# Altium PCB arduino_Uno_Rev3-02-TH_2022-03-31.pcbdoc (part 2 of 2)
Units mil, origin at the board's own origin, x right, y up, seen from the top; angles counter-clockwise.
Board outline 5460.48 x 4115 mil, 2 copper layers (Top Layer, Bottom Layer); 53 components, 61 nets, 247 pads, 72 vias.
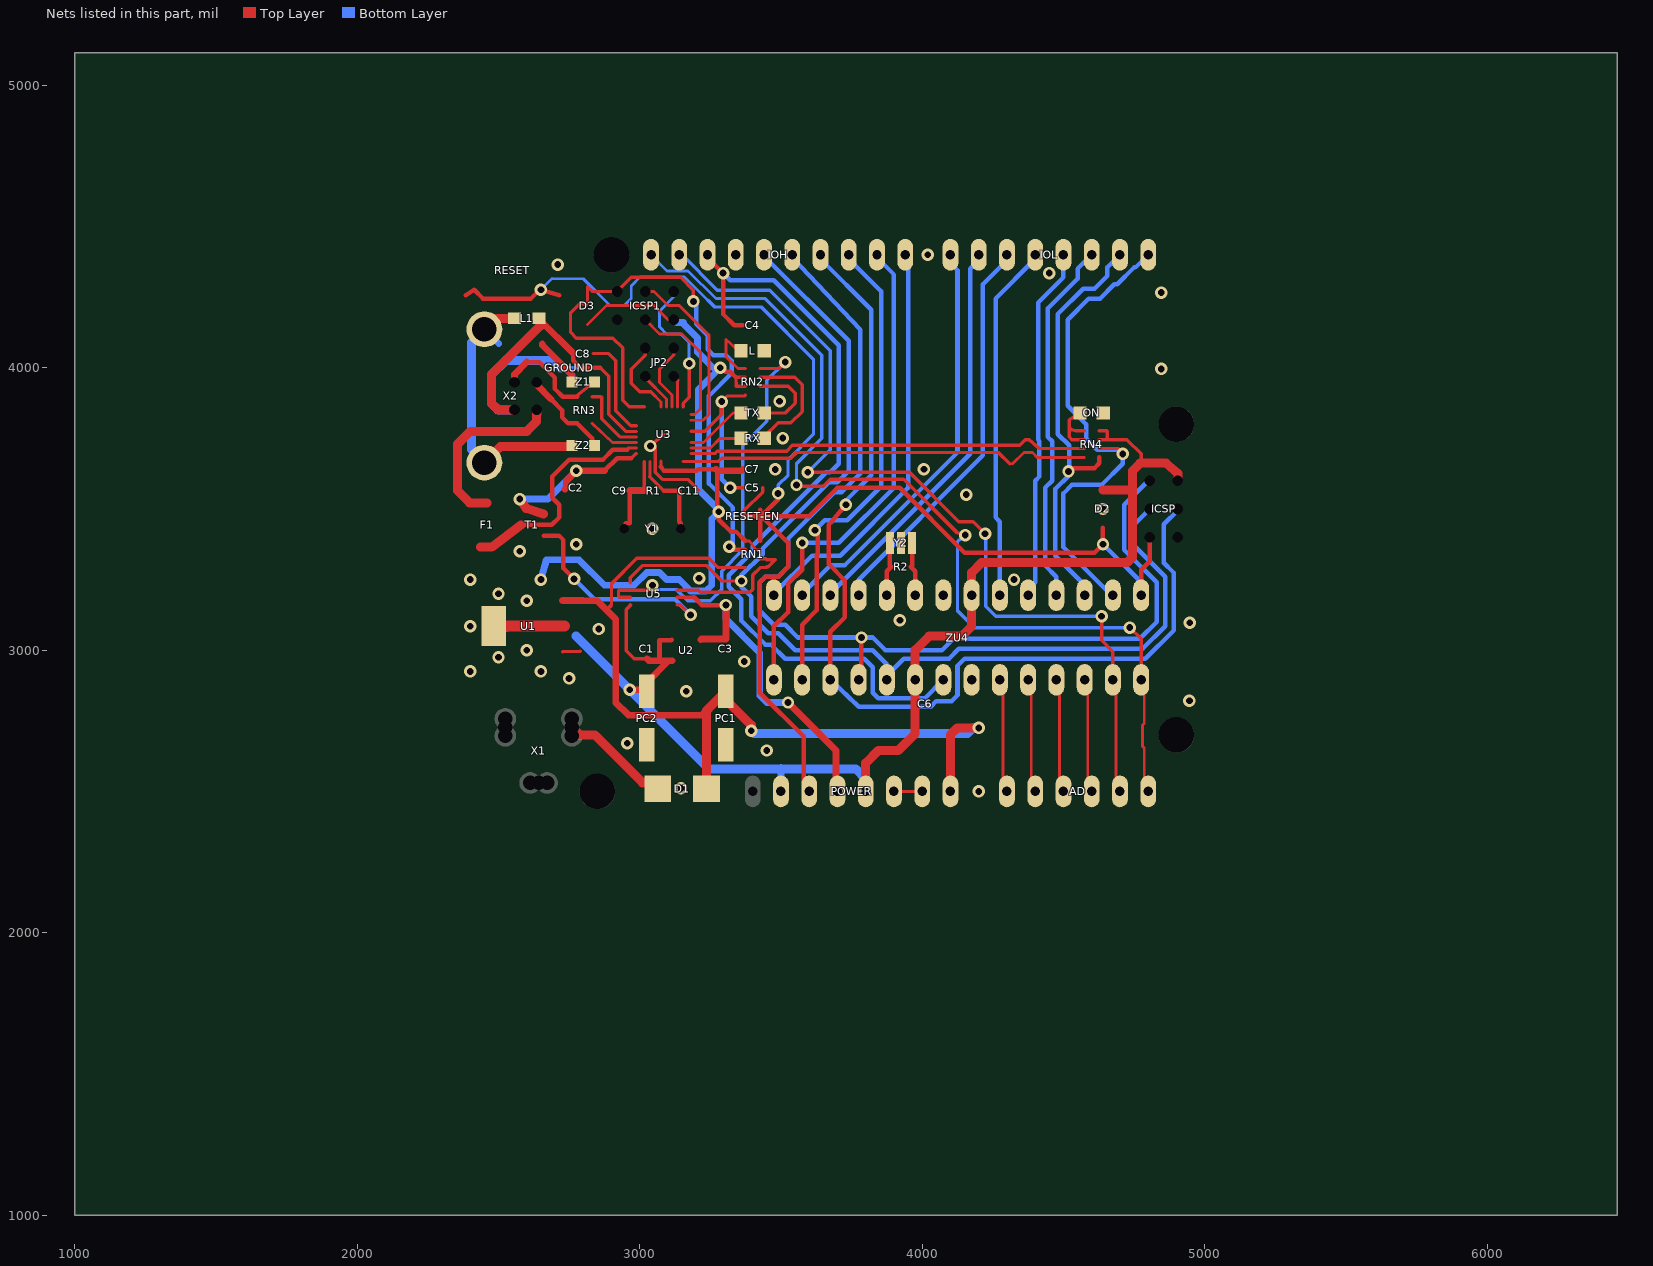
[diagram p2: the nets of this part, all layers, seen from the top]

## Via types
v1: diameter 44, hole 24, Top Layer to Bottom Layer, tented both sides, 72 vias

## Nets (pads, with @x,y where several pads share a name; then routed paths per layer and width w, separated by ;. In a path a pad name is that pad's centre, name@x,y a point inside that pad or via, vN(x,y) a via of type N, cw(c..) or ccw(c..) an arc to the next point about the centre after c; other vN are vias at no path point)
5-GND: RESET.5
+3V3: C3.2 POWER.4 U2.5 U5.2 | length 1260.5
  Top Layer w12: U5.2@3133.19,3187.16 3190.2,3187.2
  Top Layer w16: 3190.2,3187.2 3192.8,3187.2 3220,3160 v1(3305,3160)
  Top Layer w24: U2.5@3216.18,3037.4 3218.8,3040 C3.2@3305,3040 v1(3305,3160) ; v1(3525,2815) 3695,2645 3695,2505 POWER.4@3700,2500
  Bottom Layer w24: v1(3305,3160) 3305,3110 3425,2990 3425,2840 3450,2815 v1(3525,2815)
+5V: C1.2 C2.2 C6.2 C7.1 D2.C D3.C ICSP1.2 ICSP.2 PC2.+ POWER.2 POWER.5 RN1.3 RN1.5 RN2.2 RN2.3 RN4.3 RN4.4 T1.2 U1.2 U1.4 U2.1 U2.3 U3.4 U3.32 U5.8 ZU4.7 ZU4.20 | length 8645.2
  Top Layer w10: D3.C@2815,4153.07 2881.9,4220 3050,4220 3100,4170 ICSP1.2@3120,4170 ; 3375.7,3385 RN1.5@3373.42,3387.24 3388.8,3387.2 3411.3,3355.7 3426.6,3355.7
  Top Layer w12: 2966.9,3161.6 2968.4,3160 2952.5,3144.1 2952.5,2997.5 2980,2970 C1.2@3025,2970 ; 2970,3680 2986.1,3696.1 U3.32@2988.54,3696.1 ; 3075.2,3649.8 U3.4@3075.16,3668.54 ; RN2.3@3373.42,3934.25 3342.2,3934.2 3340.8,3965.7 RN2.2@3373.42,3965.74 ; 4626.6,3745.7 4655,3745.7 ; RN4.4@4626.57,3777.24 4652.8,3777.2 4655,3775 4655,3745.7 ; 4775,3662 4775,3695 4724.3,3745.7 4655,3745.7
  Top Layer w16: 2875,3635 2920,3680 2970,3680 ; 3070,2962.6 3070,3035 3111.4,3035 U2.1@3113.82,3037.4 ; 3075.2,3649.8 3085,3635 3201.1,3635 3206.6,3640.5 3270,3640.5 ; 3275,3635.5 3275,3510 v1(3280,3490) 3280,3461.9 3321.9,3420 3340.7,3420 RN1.5@3373.42,3387.24 ; v1(3285,4000) 3305,3985 3320.8,3985.7 3340.8,3965.7 ; 3967.4,2807.4 3975,2800
  Top Layer w20: U1.2@2727,3085 2734,3086 ; 4900,3600 ICSP.2@4905,3600
  Top Layer w24: 2735,3570 C2.2@2740,3575 2740,3600 v1(2775,3635) 2875,3635 ; v1(2965,2860) 3039.5,2860 PC2.+@3025,2854.49 3025,2885 3102.6,2962.6 U2.3@3113.82,2962.6 3070,2962.6 3032.4,2962.6 C1.2@3025,2970 ; 3270,3640.5 3275,3635.5 3360.5,3635.5 C7.1@3365,3640 ; C6.2@3975,2810 3976.5,2828.5 ZU4.20@3975,2850
  Top Layer w32: v1(2575,3535) 2598,3502 T1.2@2660,3482 ; POWER.5@3800,2500 3800,2600 3845,2645 3915,2645 3975,2705 3975,2800 C6.2@3975,2810 3975,2850 ZU4.20@3975,2895 3975,3000 4025,3050 4140,3050 4175,3085 ZU4.7@4175,3195 4175,3275 4210,3310 4725,3310 4745,3330 4745,3560 ; D2.C@4640,3566.93 4738.1,3566.9 4745,3560 ; 4905,3598.5 ICSP.2@4905,3600 4905,3625 4863,3662 4775,3662 4772,3662 4745,3635 4745,3560
  Top Layer w40: U1.4@2482.99,3085 2530,3085 2531,3086 2734,3086
  Bottom Layer w24: v1(2575,3535) 2675,3535 v1(2775,3635) ; v1(2650,3250) 2670,3320 2785,3320 2875,3230 2980,3230 3025,3275 3070,3275 3095,3250 3140,3250 3180,3210 3235,3210 3255,3230 3255,3465 v1(3280,3490) 3280,3496.6 3208.3,3568.3 3208.3,3923.3 v1(3285,4000) 3260,4000 3205,4055 3205,4105 3155,4155 3155,4160 3130,4160 ICSP1.2@3120,4170 ; POWER.2@3500,2500 3500,2585 3505,2580
  Bottom Layer w32: 2775,3050 v1(2965,2860) 3245,2580 3505,2580 3764,2580 3801,2543 POWER.5@3800,2500
  other v1: 2400,2925 2650,2925 2500,2975 2600,3000 2400,3085 2600,3175 2500,3200 2400,3250 2575,3350
AD0: AD.1 ZU4.23 | length 403.2
  Top Layer w10: ZU4.23@4275,2895 4286,2879 4286,2518 AD.1@4300,2500
AD1: AD.2 ZU4.24 | length 403.2
  Top Layer w10: ZU4.24@4375,2895 4386,2879 4386,2518 AD.2@4400,2500
AD2: AD.3 ZU4.25 | length 403.2
  Top Layer w10: ZU4.25@4475,2895 4486,2879 4486,2518 AD.3@4500,2500
AD3: AD.4 ZU4.26 | length 403.2
  Top Layer w10: ZU4.26@4575,2895 4586,2879 4586,2518 AD.4@4600,2500
AD4/SDA: AD.5 IOH.9 ZU4.27 | length 3192.3
  Top Layer w10: ZU4.27@4675,2895 4686,2879 4686,2518 AD.5@4700,2500
  Top Layer w12: v1(3595,3630) 3955,3630 4130,3455 4180,3455 v1(4222.5,3412.5) v1@4230,3410 ; v1(4635,3120) 4635,3035 4675,2995 ZU4.27@4675,2895
  Bottom Layer w12: IOH.9@3140,4400 3150,4400 3275,4275 3460,4275 3675,4060 3675,3710 v1(3595,3630) ; v1(4222.5,3412.5) 4225,3410 4225,3155 4260,3120 v1(4635,3120)
AD5/SCL: AD.6 IOH.10 ZU4.28 | length 3469.1
  Top Layer w10: ZU4.28@4775,2895 4786,2879 4786,2741 4780,2735 4780,2660 4786,2654 4786,2518 AD.6@4800,2500
  Top Layer w12: v1(3555,3585) 3555,3580 3650,3580 3675,3605 3935,3605 4125,3415 4145,3415 v1(4152.5,3407.5) ; v1(4735,3080) 4775,3040 ZU4.28@4775,2895
  Bottom Layer w10: IOH.10@3040,4400 3096,4343 3171,4343 3270,4245
  Bottom Layer w12: 3270,4245 3445,4245 3645,4045 3645,3750 3555,3660 v1(3555,3585) ; v1(4152.5,3407.5) 4125,3385 4125,3140 4185,3080 v1(4735,3080)
AREF: C4.2 IOH.8 ZU4.21 | length 2907.5
  Top Layer w16: IOH.8@3240,4400 3240,4390 v1(3295,4335) 3295,4190 3335,4150 C4.2@3365,4150
  Bottom Layer w16: v1(3295,4335) 3320,4310 3475,4310 3705,4080 3705,3660 3675,3630 3660,3630 3400,3370 3400,3350 3315,3265 3315,3225 3360,3180 3360,3105 3445,3020 3465,3020 3515,2970 3795,2970 3825,2940 3825,2850 3845,2830 4010,2830 ZU4.21@4075,2895
CMP: RN1.1 RN1.2 U5.3 | length 482.7
  Top Layer w12: 3133.2,3212.7 3207.2,3212.7 3215,3205 3390,3205 3400,3215 3400,3266.2 3426.6,3292.7 3447.8,3292.7 3450,3295 3455,3295 3480,3320 3450,3320 3445.8,3324.2 RN1.2@3426.57,3324.25
D+: RN3.5 X2.3 Z1.1 | length 426.7
  Top Layer w12: RN3.5@2778.42,3897.24 2776.2,3900 Z1.1@2839.37,3950
  Top Layer w16: 2600,4020 2645,4020 2700,3965 2700,3925 2727.8,3897.2 RN3.5@2778.42,3897.24
  Top Layer w24: X2.3@2556.7,3949.2 2556.7,3976.7 2600,4020
  Bottom Layer w24: 2555.9,3950 X2.3@2556.7,3949.2
D-: RN3.8 X2.2 Z2.1 | length 325.3
  Top Layer w16: 2686.5,3888.5 2725,3850 2725,3825 2747.2,3802.7 2778.4,3802.7 2831.2,3750 Z2.1@2839.37,3725
  Top Layer w24: X2.2@2635.4,3949.2 2635.8,3939.2 2686.5,3888.5
  Bottom Layer w12: 2635,3949.6 X2.2@2635.4,3949.2
DTR: C5.1 RN2.4 U3.13 | length 633.7
  Top Layer w10: v1(3290,3880) 3310,3900 3370.7,3900
  Top Layer w12: 3181.5,3774.8 3229.8,3774.8 3290,3835 v1(3290,3880) ; v1@3340,3575 C5.1@3365,3575 ; 3370.7,3900 3373.4,3902.7
  Top Layer w16: v1(3320,3575) v1@3340,3575
  Bottom Layer w16: v1(3290,3880) 3290,3605 v1(3320,3575)
GATE_CMD: T1.3 U5.1 | length 767.5
  Top Layer w12: U5.1@3133.19,3161.57 3143.4,3161.6 v1(3180,3125)
  Top Layer w16: T1.3@2660,3406 2714,3406 2730,3390 2730,3290 2757.5,3262.5 v1(2767.5,3252.5) v1@2775,3245
  Bottom Layer w16: v1(2767.5,3252.5) 2840,3180 3125,3180 v1(3180,3125)
GND: C1.1 C2.1 C3.1 C4.1 C6.1 C7.2 C9.2 C11.2 GROUND.1 ICSP1.6 ICSP.6 IOH.7 L.C ON.C PC1.- PC2.- POWER.6 POWER.7 RESET.1 RESET.2 RN1.7 RN2.5 U1.1 U2.2 U3.3 U3.33 U5.4 X1.1 X1.3 Y2.2 ZU4.8 ZU4.22 | length 571.8
  Top Layer w11: 3055,3670 3055,3630 3080,3605 3170,3605 C11.2@3210,3565
  Top Layer w12: U1.1@2727,2994 2790,2996 ; U3.3@3055.47,3668.54 3055.5,3719.5 v1(3038,3723) U3.33@3085,3765 ; POWER.6@3900,2500 POWER.7@4000,2500
  Bottom Layer w12: 2725,4000 GROUND.1@2780,4000
  other v1: 4200,2500 3146,2511 3450,2645 2956,2671 4945.99,2821 3165,2855 2750,2900 3370,2960 2855,3075 4946.99,3097 3921,3106 4325,3250 3210,3255 2775,3375 3045,3430 4640,3500 4156,3551 3480,3640 4006,3641 3506,3751 3495,3881 4845.99,3996 4845.99,4266 4450,4335 2710,4365 4020,4400
IO0: IOL.1 RN4.2 ZU4.2 | length 1795.2
  Top Layer w12: RN4.2@4626.57,3714.25 4690.7,3714.2 v1(4710,3695)
  Bottom Layer w16: ZU4.2@4675,3195 4670,3195 4500,3365 4500,3555 4530,3585 4635,3585 4710,3660 v1(4710,3695) 4695,3710 4620,3710 4580,3750 4580,3800 4515,3865 4515,4170 4590,4245 4630,4245 4680,4295 4690,4295 4750,4355 4755,4355 IOL.1@4800,4400
IO1: IOL.2 RN4.1 ZU4.3 | length 1542.1
  Top Layer w16: v1(4518,3633) 4530,3645 4610,3645 4626.6,3661.6 4626.6,3682.7
  Bottom Layer w16: ZU4.3@4575,3195 4575,3230 4471,3334 4471,3571 4520,3620 4520,3625 v1(4518,3633) 4520,3635 4520,3725 4480,3765 4480,4190 4570,4280 4610,4280 4655,4325 4655,4355 IOL.2@4700,4400
IO2: IOL.3 ZU4.4 | length 1302.3
  Bottom Layer w16: ZU4.4@4475,3195 4475,3260 4435,3300 4435,3575 4460,3600 4460,3740 4445,3755 4445,4210 4550,4315 4550,4350 IOL.3@4600,4400
IO3: IOL.4 ZU4.5 | length 1260.9
  Bottom Layer w16: ZU4.5@4375,3195 4375,3215 4400,3240 4400,3600 4415,3615 4415,3740 4410,3745 4410,4230 4500,4320 IOL.4@4500,4400
IO4: IOL.5 ZU4.6 | length 1267.7
  Bottom Layer w16: ZU4.6@4275,3195 4275,3455 4260,3470 4260,4245 4395,4380 IOL.5@4400,4400
IO5: IOL.6 ZU4.11 | length 1422.5
  Bottom Layer w16: ZU4.11@3775,3195 3775,3250 4215,3690 4215,4295 4300,4380 IOL.6@4300,4400
IO6: IOL.7 ZU4.12 | length 1422.5
  Bottom Layer w16: ZU4.12@3675,3195 3675,3200 4170,3695 4170,4350 4200,4380 IOL.7@4200,4400
IO7: IOL.8 ZU4.13 | length 1472.5
  Bottom Layer w16: ZU4.13@3575,3195 3575,3200 3675,3300 3725,3300 4125,3700 4125,4345 4100,4370 IOL.8@4100,4400
IO8: IOH.1 ZU4.14 | length 1484.5
  Bottom Layer w16: ZU4.14@3475,3195 3475,3200 3610,3335 3710,3335 3950,3575 3950,4390 3940,4380 IOH.1@3940,4400
IO9: IOH.2 ZU4.15 | length 1782
  Top Layer w16: ZU4.15@3475,2895 3475,3085 3525,3135 3525,3235 3575,3285 v1(3575,3380)
  Bottom Layer w16: v1(3575,3380) 3705,3380 3900,3575 3900,4330 3840,4390 IOH.2@3840,4400
L13: RN2.8 U5.6 U5.7 | length 1471.7
  Top Layer w12: 2966.9,3187.2 2927.8,3187.2 2925,3190 2925,3210 2927.8,3212.7 2966.9,3212.7 3027.8,3212.7 3030,3215 v1(3045,3230) ; RN2.8@3426.57,3997.24 3492.2,3997.2 v1(3515,4020)
  Bottom Layer w12: v1(3045,3230) 3060,3215 3130,3215 3170,3175 3250,3175 3290,3215 3290,3280 3365,3355 3365,3725 3450,3810 3450,3955 v1(3515,4020)
M8RXD: RN4.7 U3.9 | length 1423.6
  Top Layer w11: 3181.5,3696.1 3266.1,3696.1 3275,3705
  Top Layer w12: 3275,3705 3520,3705 3540,3725 4345,3725 4365,3745 4378.5,3745 4414.3,3714.2 RN4.7@4573.42,3714.25
M8TXD: RN4.8 U3.8 | length 1472.9
  Top Layer w10: 4310,3660 4320,3660 4360,3700 4390,3700 4407.2,3682.7 4573.4,3682.7
  Top Layer w11: U3.8@3153.9,3668.54 3278.5,3668.5 3290,3680
  Top Layer w12: 3290,3680 3535,3680 3555,3700 4270,3700 4310,3660
MISO: ICSP.1 IOH.5 ZU4.18 | length 3805.3
  Top Layer w16: ZU4.18@3775,2895 3785,2905 v1(3785,3045)
  Bottom Layer w16: IOH.5@3540,4400 3540,4390 3780,4135 3780,3625 3715,3560 3690,3560 3525,3395 3525,3295 3490,3260 3445,3260 3425,3240 3425,3140 3475,3090 3515,3090 3560,3045 v1(3785,3045) ; v1@3790,3040 3790,3035 v1(3785,3045) ; ICSP.1@4805,3600 4798,3598 4715,3515 4715,3355 4830,3240 4830,3100 4770,3040 4110,3040 4070,3000 3870,3000 3825,3045 v1(3785,3045)
MISO2: ICSP1.1 U3.17 | length 570.8
  Top Layer w10: 3175,3955 v1(3175,4015)
  Top Layer w11: U3.17@3153.9,3861.45 3153.9,3873.9 3160,3880
  Top Layer w12: 3160,3880 3175,3895 v1(3175,4015)
  Bottom Layer w10: ICSP1.1@3120,4270 3120,4250 3070,4200 3070,4145 3095,4120 3145,4120 3175,4090 v1(3175,4015)
MOSI: ICSP.4 IOH.4 ZU4.17 | length 3575.1
  Top Layer w16: ZU4.17@3675,2895 3675,3065 3726,3116 3726,3247 3670,3305 3670,3445 3680,3455 v1(3730,3515)
  Bottom Layer w15: 4855,3309 4855,3446
  Bottom Layer w16: IOH.4@3640,4400 3640,4385 3820,4205 3820,3620 3730,3530 v1(3730,3515) ; ZU4.17@3675,2895 3775,2800 4030,2800 4050,2820 4105,2820 4125,2840 4125,2945 4150,2970 4790,2970 4890,3070 4890,3275 4855,3309 ; 4855,3446 4905.5,3495.5 ICSP.4@4905,3500
MOSI2: ICSP1.4 U3.16 | length 484.9
  Top Layer w10: ICSP1.4@3020,4170 3070,4120 3150,4120 3215,4055 3215,3855 3193.9,3833.9 3181.5,3833.9
N$1: L.A RN2.1 | length 215
  Top Layer w11: L.A@3358.66,4060 3350,4060 3305,4100 3305,4040 3347.8,3997.2 RN2.1@3373.42,3997.24
N$3: ON.A RN4.5 RN4.6 | length 221.2
  Top Layer w12: ON.A@4558.66,3840 4520,3815 4520,3790 ; 4573.4,3745.7 4529.3,3745.7 4520,3755 4520,3790 ; RN4.5@4573.42,3777.24 4542.8,3777.2 4530,3780 4520,3790
N$35: RN2.7 RX.A | length 432.6
  Top Layer w12: RN2.7@3426.57,3965.74 3549.3,3965.7 3575,3940 3575,3845 3535,3805 3490,3805 3440,3755 3440,3750 RX.A@3441.34,3750
N$36: RN2.6 TX.A | length 291.7
  Top Layer w12: RN2.6@3426.57,3934.25 3525.8,3934.2 3535,3925 3550,3910 3550,3875 3514.8,3839.8 3451.6,3839.8 TX.A@3441.34,3840
PB4: JP2.1 U3.18 | length 114.5
  Top Layer w11: U3.18@3134.21,3861.45 3134.2,3955.8
  Top Layer w12: JP2.1@3120,3970 3134.2,3955.8
PB5: JP2.3 U3.19 | length 247.7
  Top Layer w11: U3.19@3114.53,3861.45 3114.5,3903.5 3070,3948 3070,3995 3120,4045
  Top Layer w12: 3120,4045 JP2.3@3120,4070
PB6: JP2.2 U3.20 | length 139.6
  Top Layer w11: JP2.2@3020,3970 3020,3964 3094.8,3889.1 U3.20@3094.84,3861.45
PB7: JP2.4 U3.21 | length 295.7
  Top Layer w11: 3000,3915 3039,3915 3075.2,3878.8 U3.21@3075.16,3861.45
  Top Layer w12: 3000,3915 2970,3945 2970,3995 3020,4045 JP2.4@3020,4070
PWRIN: D1.A X1.2 | length 396.1
  Top Layer w32: X1.2@2760,2727 2787,2700 2840,2700 3010,2530 3043.4,2530 D1.A@3063.38,2510
  Bottom Layer w32: X1.2@2760,2727 2762,2725
RD+: RN3.4 U3.29 | length 259.7
  Top Layer w11: 2865,3820 2929.8,3755.1 2988.5,3755.1
  Top Layer w12: RN3.4@2831.57,3897.24 2862.8,3897.2 2865,3895 2865,3820
RD-: RN3.1 U3.30 | length 184.4
  Top Layer w10: 2831.6,3802.7 2832.7,3802.7
  Top Layer w11: 2831.6,3802.7 2903.9,3735.5 U3.30@2988.54,3735.47
RESET: C5.2 D2.A ICSP.5 POWER.3 RESET-EN.1 RESET-EN.2 RESET.3 RESET.4 RN1.4 ZU4.1 | length 5550.3
  Top Layer w12: RESET-EN.1@3370,3475 3370,3495 3435,3560 C5.2@3435,3575
  Top Layer w16: 2384.7,4256.4 2413.6,4276.4 2445,4245 2615,4245 2645,4275 v1(2650,4276.41) RESET.4@2715.35,4256.41 ; RESET-EN.1@3370,3475 RESET-EN.2@3430,3475 ; RN1.4@3426.57,3387.24 3426.6,3496.6 RESET-EN.2@3430,3475 ; v1(3490,3555) 3490,3535 RESET-EN.2@3430,3475 ; POWER.3@3600,2500 3580,2520 3580,2695 3425,2850 3425,3240 3445,3260 3490,3260 3525,3295 3525,3380 RESET-EN.2@3430,3475 ; D2.A@4640,3433.07 v1(4640,3375) 4610,3345 4150,3345 3920,3575 3700,3575 3600,3475 RESET-EN.2@3430,3475 ; ZU4.1@4775,3195 4775,3285 4805.5,3315.5 ICSP.5@4805,3400
  Bottom Layer w10: v1(2650,4276.41) 2689.6,4316 2695.6,4315 2800,4315 2895,4220 2945,4220 2970,4245 2970,4290 3001,4321 3159,4321 3240,4240
  Bottom Layer w12: 3240,4240 3265,4215 3430,4215 3615,4030 3615,3765 3525,3675 3525,3620 3490,3585 v1(3490,3555)
  Bottom Layer w16: v1(4640,3375) 4775,3240 ZU4.1@4775,3195
RESET2: D3.A ICSP1.5 RN1.6 U3.24 | length 2229
  Top Layer w12: U3.24@3016.1,3861.45 2963.5,3861.4 2940,3885 2940,4070 2905,4105 2775,4105 2755,4125 2755,4186.9 2755,4195 2786.9,4226.9 2815,4226.9 D3.A@2815,4286.93 2831.9,4270 ICSP1.5@2920,4270 2970,4320 3145,4320 3190,4275 v1(3190,4235)
  Top Layer w16: v1(3317,3366) 3317.3,3365.7 3330,3355 3330.8,3355.7 3373.4,3355.7
  Bottom Layer w16: v1(3190,4235) 3200,4225 3200,4155 3240,4115 3240,4065 3260,4045 3305,4045 3325,4025 3325,3980 3245,3900 3245,3590 3330,3505 3330,3379 v1(3317,3366)
RXLED: RX.C U3.10 | length 191.4
  Top Layer w11: 3181.5,3715.8 3250.8,3715.8 3285,3750 RX.C@3358.66,3750
SCK: ICSP.3 IOH.6 U5.5 ZU4.19 | length 4196.4
  Top Layer w12: 2966.9,3238.3 2966.9,3256.8 3010,3300 3235,3300 3290,3245 v1(3360,3245)
  Bottom Layer w16: IOH.6@3440,4400 3440,4395 3740,4095 3740,3635 3700,3595 3670,3595 3435,3360 3435,3340 3360,3265 v1(3360,3245) 3360,3225 3395,3190 3395,3120 3455,3060 3490,3060 3550,3000 3825,3000 3875,2950 ZU4.19@3875,2910 ; ZU4.19@3875,2895 ZU4.19@3875,2910 ; ICSP.3@4805,3500 4745,3440 4745,3375 4860,3260 4860,3085 4780,3005 4130,3005 4095,2970 3935,2970 ZU4.19@3875,2910
SCK2: ICSP1.3 U3.15 | length 641.3
  Top Layer w10: ICSP1.3@3020,4270 3050,4270 3100,4220 3140,4220 3245,4115 3245,3835 3224.2,3814.2 3181.5,3814.2
SS: IOH.3 ZU4.16 | length 1723.8
  Top Layer w16: ZU4.16@3575,2895 3575,3090 3626,3141 3626,3338 3630,3342 3630,3415 v1(3620,3425)
  Bottom Layer w16: v1(3620,3425) 3655,3460 3735,3460 3855,3580 3855,4270 3740,4385 IOH.3@3740,4400
TP_VUCAP: C8.1 U3.27 | length 363
  Top Layer w11: C8.1@2835,4050 2890,4050 2915,4025 2915,3995 ; 2915,3848 2968.5,3794.5 U3.27@2988.54,3794.52
  Top Layer w12: 2915,3848 2915,3995
TXLED: TX.C U3.11 | length 220.5
  Top Layer w11: 3181.5,3735.5 3225.5,3735.5 3330,3840 TX.C@3358.66,3840
UGND: C8.2 GROUND.2 L1.1 U3.28 X2.4 | length 1540.2
  Top Layer w11: 2890,3835 2950.2,3774.8 U3.28@2988.54,3774.84
  Top Layer w12: 2860,4000 2890,3970 2890,3835
  Top Layer w16: C8.2@2765,4050 2765,4025 2790,4000 2860,4000
  Top Layer w24: L1.1@2643.31,4175 2643.3,4171.7 C8.2@2765,4050
  Top Layer w32: X2.4@2556.7,3850.8 2555.9,3850 2500,3850 2475,3875 2475,3975 2648.3,4148.3 L1.1@2643.31,4175
  Bottom Layer w24: 2555.9,3850 X2.4@2556.7,3850.8
  Bottom Layer w32: X2.4@2556.7,3850.8 2499.2,3850.8 2475,3875 2475,3975 2525,4025 2695,4025 GROUND.2@2720,4000
USBVCC: F1.1 T1.1 U3.31 | length 811.2
  Top Layer w12: 2955,3710 2960.8,3715.8 U3.31@2988.54,3715.78
  Top Layer w16: T1.1@2580,3444 2689,3444 2715,3470 2715,3515 2690,3540 2690,3615 2750,3675 2870,3675 2905,3710 2955,3710
  Top Layer w32: 2436.8,3365 2476,3365 T1.1@2580,3444
USHIELD: L1.2 X2.P$1 X2.P$2 Z1.2 Z2.2 | length 1219.5
  Top Layer w24: 2655,4085 2655,4080 2760.6,3974.4 Z1.2@2760.63,3950 ; 2735.6,3720.6 2740.6,3720.6 2745,3725 Z2.2@2760.63,3725
  Top Layer w32: X2.P$2@2450,3663.8 2506.9,3720.6 2735.6,3720.6 ; X2.P$1@2450,4136.2 2488.8,4175 L1.2@2556.69,4175
  Bottom Layer w24: X2.P$1@2450,4136.2 2501.2,4085
  Bottom Layer w32: X2.P$2@2450,3663.8 2450,3665 2405,3710 2405,4090 2450,4135 X2.P$1@2450,4136.2
VIN: D1.C PC1.+ POWER.8 RN1.8 U1.3 | length 3221.2
  Top Layer w12: 2882.5,3142.5 2900,3160 2900,3235 2990,3325 3245,3325 3277.2,3292.7 3373.4,3292.7
  Top Layer w24: U1.3@2727,3176 2798.8,3176 2850,3174.8 ; 2800,3175 2850,3174.8 ; 3242.8,2792.2 3220.5,2770 2960,2770 2915,2815 2915,3110 2882.5,3142.5 2875,3150 2850,3174.8 ; PC1.+@3305,2854.49 PC1.+@3305.5,2850
  Top Layer w32: D1.C@3236.61,2510 3236.6,2786.1 3242.8,2792.2 PC1.+@3305,2854.49 3305,2825 3395,2735 v1(3395,2715) ; POWER.8@4100,2500 4100,2700 4125,2725 v1(4200,2725)
  Bottom Layer w32: v1(3395,2715) 3405,2705 4160,2705 4180,2725 v1(4200,2725)
XT1: C9.1 R1.1 U3.1 Y1.2 | length 311.3
  Top Layer w10: R1.1@3015,3565 3020,3570
  Top Layer w11: 3016.1,3571.1 U3.1@3016.1,3668.54
  Top Layer w12: R1.1@3015,3565 3016.1,3571.1
  Top Layer w16: Y1.2@2945,3430 2950,3450 2965,3450 C9.1@2965,3565
  Top Layer w24: C9.1@2965,3565 R1.1@3015,3565
XT2: C11.1 R1.2 U3.2 Y1.1 | length 316
  Top Layer w11: 3035.8,3614.2 U3.2@3035.79,3668.54
  Top Layer w12: 3035.8,3614.2 R1.2@3085,3565
  Top Layer w16: R1.2@3085,3565 C11.1@3140,3565 3140,3455 3145,3450 Y1.1@3145,3430
XTAL1: R2.1 Y2.3 ZU4.9 | length 193
  Top Layer w16: Y2.3@3964.37,3380 3964.4,3299.4 R2.1@3960,3295 3975,3280 ZU4.9@3975,3195
XTAL2: R2.2 Y2.1 ZU4.10 | length 193
  Top Layer w16: ZU4.10@3875,3195 3875,3280 R2.2@3890,3295 3885.6,3299.4 Y2.1@3885.63,3380
XUSB: F1.2 X2.1 | length 642.5
  Top Layer w32: F1.2@2460,3521.77 2398.2,3521.8 2355,3565 2355,3730 2400,3775 2600,3775 2635,3810 X2.1@2635.4,3850.8
  Bottom Layer w12: 2635,3850.3 X2.1@2635.4,3850.8
pads on no net: FD1.P$1 FD2.P$1 FD3.P$1 POWER.1 RN3.2 RN3.3 RN3.6 RN3.7 U2.4 U3.5 U3.6 U3.7 U3.12 U3.14 U3.22 U3.23 U3.25 U3.26 X1.4 X1.5 X1.6 X1.7 X1.8 X1.9

## Polygon pours and split planes (outlines as drawn)
+5V on Bottom Layer (solid): 2335,3570 2725,3570 2725,3240 2800,3165 2800,3035 2665,2900 2335,2900
GND on Bottom Layer (solid): 2325,4475 4964.99,4475 4974.99,4465 4974.99,2425 2335,2425 2325,2435 2325,3585 2750,3585 2750,4225 2325,4225
+5V on Top Layer (solid): 2350,2900 2350,3575 2700,3575 2700,2900
GND on Top Layer (solid): 2325,4475 4974.99,4475 4974.99,2425 2325,2425 2320,3600 2750,3600 2750,4225 2325,4225

## Keep-outs
Keep-Out Layer:
  lines w10: 2300,2439.37 ccw(c2339.37,2439.37) 2339.37,2400 ; 2300,4460.63 cw(c2339.37,4460.63) 2339.37,4500 ; 4860.62,2400 ccw(c4860.62,2439.37) 4899.99,2439.37

## Other copper
Top Layer:
  text "Use of the Arduino name must be compliant with http://www.arduino.cc/en/Main/Policy" at 1500,1500 h70
Bottom Layer:
  text "2011-3-02" at 2343,2565.8 h32 r270

## Silkscreen, mask and mechanical layers (free items; w line width, h text height)
Top Overlay:
  lines w10: 3179.37,4316.5 cw(c3170,4319.99) 3180,4320
  lines w12: 3450,4220 3495,4175 3815,4175 ; 4235,4175 4555,4175 4600,4220
  text "ITALY" at 3895,4545 h70
  text "MADE IN" at 3445,4540 h70
  text "Edition" at 5464.19,4433.75 h56
  text "Prototype" at 4957.94,4431.07 h56 r356
  text "Limited" at 5039.44,4365 h56
  text "4" at 4375.35,4296.06 h56 r234
  text "7" at 4072.62,4291.43 h56 r245
  text "8" at 3910,4279.6 h56 r270
  text "5" at 4270,4279.6 h56 r270
  text "3" at 4470,4279.6 h56 r270
  text "2" at 4570,4279.6 h56 r270
  text "1" at 4670,4279.6 h56 r270
  text "0" at 4770,4279.6 h56 r270
  text "9" at 3810.11,4277.16 h56 r275
  text "6" at 4170.11,4277.16 h56 r275
  text "11" at 3638,4257.2 h56 r180
  text "13" at 3466,4229.2 h56 r90
  text "12" at 3566,4229.2 h56 r90
  text "10" at 3766,4229.2 h56 r90
Document:
  rectangle: 3200,4135 3270,4335
  rectangle: 3300,4190 3365,4335
  rectangle: 3420,4185 3465,4320
  rectangle: 3520,4185 3565,4320
  rectangle: 3620,4185 3665,4320
  rectangle: 3720,4185 3765,4320
  rectangle: 3825,4260 3870,4320
  rectangle: 3885,4175 4175,4245
  rectangle: 4675,4140 4730,4240
  rectangle: 4775,4140 4830,4240
  rectangle: 4715,3810 4850,3865
  rectangle: 2325,3260 2380,3585
  rectangle: 2525,3290 2590,3585
  rectangle: 4185,2805 4210,2825
  rectangle: 4285,2800 4305,2835
  rectangle: 2745,3535 2800,3625
  rectangle: 4065,4270 4115,4325
  rectangle: 4175,4265 4220,4325
  rectangle: 4275,4265 4320,4325
  rectangle: 4380,4265 4425,4325
  rectangle: 4475,4265 4520,4325
  rectangle: 4580,4265 4625,4325
  rectangle: 4680,4265 4725,4325
  rectangle: 4780,4265 4825,4325
  rectangle: 3925,4260 3970,4320
  rectangle: 2310,2890 2670,3365
  lines w12: 3045.59,3965.38 cw(c3020,3969.98) 3046,3970 ; 3045.59,4065.38 cw(c3020,4069.98) 3046,4070 ; 3145.66,3965.37 cw(c3120,3969.98) 3146.07,3970 ; 3145.66,4065.37 cw(c3120,4069.98) 3146.07,4070 ; 4680,4220 4700,4240 4720,4220 4690,4220 4705,4230 ; 4785,4245 4825,4245 4805,4225 4790,4240 4810,4240 ; 4805,4230 4805,4235 ; 4665,4215 4735,4215 4700,4250 4665,4215 ; 4770,4250 4840,4250 4805,4215 4770,4250
  text "SCL" at 3068.83,4514.48 h56 r90
  text "SDA" at 3178.83,4509.48 h56 r90
  text "M.Banzi" at 1996.89,4430 h45 r1
  text "D.Cuartielles" at 1750.5,4355 h45
  text "MADE IN" at 5824.99,4306 h56 r180
  text "T.Igoe" at 2030.87,4295.22 h45 r352
  text "#" at 3816.27,4238.44 h44 r261
  text "#" at 4181.27,4238.44 h44 r261
  text "#" at 4276.27,4238.44 h44 r261
  text "#" at 4476.27,4238.44 h44 r261
  text "MADE IN" at 4849.99,4231 h56 r180
  text "G.Martino" at 1912.5,4230 h45
  text "designed by" at 3935.49,4226 h56 r179
  text "ITALY" at 5774.99,4206 h56 r180
  text "#" at 3621.27,4188.44 h44 r261
  text "#" at 3721.27,4188.44 h44 r261
  text "GND" at 3366.75,4183.32 h56 r90
  text "D.Mellis" at 1953,4165 h45
  text "tinker it" at 3850,4156 h56 r180
  text "DIGITAL" at 3841.43,4148.59 h66
  text "AREF" at 3262.17,4133.92 h56 r90
  text "ITALY" at 4824.99,4131 h56 r180
  text "designed by" at 5960.48,4126 h56 r179
  text "TX" at 4729.82,4110.48 h56 r90
  text "RX" at 4829.99,4110 h56 r90
  text "[#=PWM]" at 3910,4095 h44
  text "L" at 3465,4090 h50 r180
  text "tinker it" at 5874.99,4031 h56 r180
  text "TM" at 4525,3975 h40
  text "Arduino" at 3900,3900 h110
  text "TX" at 3209.2,3824 h56
  text "TX" at 3455,3820 h50
  text "ON" at 4455,3810 h50
  text "UNO" at 3900,3750 h125
  text "RX" at 3219.2,3729 h56
  text "RX" at 3465,3725 h50
  text "www.arduino.cc" at 3580,3660 h86
  text "1" at 4711.27,3628.91 h50 r180
  text "PC1" at 2975,2730 h50
  text "PC2" at 3250,2725 h50
  text "ANALOG IN" at 4290,2640 h66
  text "A1" at 4386.72,2583.31 h40 r69
  text "IOREF" at 3525,2575 h56 r90
  text "RESET" at 3610,2575 h56 r90
  text "3V3" at 3720,2570 h56 r90
  text "5V" at 3755,2570 h56
  text "VIN" at 4045,2570 h56
  text "A0" at 4268.05,2570.48 h40
  text "A2" at 4468.05,2570.48 h40
  text "A3" at 4568.05,2570.48 h40
  text "A4" at 4668.05,2570.48 h40
  text "A5" at 4768.05,2570.48 h40
  text "GND" at 3875.33,2569.48 h56
  text "ATMEGA328" at 5734.99,2530 h150 r90
  text "D:/SmartProjects/Snc/a4_bn_logo2.bmp" at 2300,2397.5 h1

## Text inside footprints (layer, text, board x,y; h text height)
U1: Top Overlay "3" at 2743,3125.19 h32 r270; Top Overlay "4" at 2475.89,3169.18 h32 r235; Top Overlay "1" at 2743,2949.07 h32 r270; Top Overlay "2" at 2743.37,3034.19 h32 r270
U3: Top Overlay "1" at 2974.26,3642.95 h32 r270
U$1: Top Layer "Reference Designs ARE PROVIDED \"AS IS\" AND \"WITH ALL FAULTS. Arduino DISCLAIMS ALL OTHER WARRANTIES, EXPRESS OR IMPLIED," at 1505,2195 h50; Top Layer "REGARDING PRODUCTS, INCLUDING BUT NOT LIMITED TO, ANY IMPLIED WARRANTIES OF MERCHANTABILITY OR FITNESS FOR A PARTICULAR PURPOSE" at 1505,2115 h50; Top Layer "Arduino may make changes to specifications and product descriptions at any time, without notice. The Customer must not" at 1505,1995 h50; Top Layer "rely on the absence or characteristics of any features or instructions marked \"reserved\" or \"undefined.\" Arduino reserves" at 1505,1915 h50; Top Layer "these for future definition and shall have no responsibility whatsoever for conflicts or incompatibilities arising from future changes to them." at 1505,1835 h50; Top Layer "The product information on the Web Site or Materials is subject to change without notice. Do not finalize a design with this information." at 1505,1715 h50; Top Layer "ARDUINO is a registered trademark." at 1505,1595 h66